# EAGLE board untitledNEW (EAGLE 7.2.0)
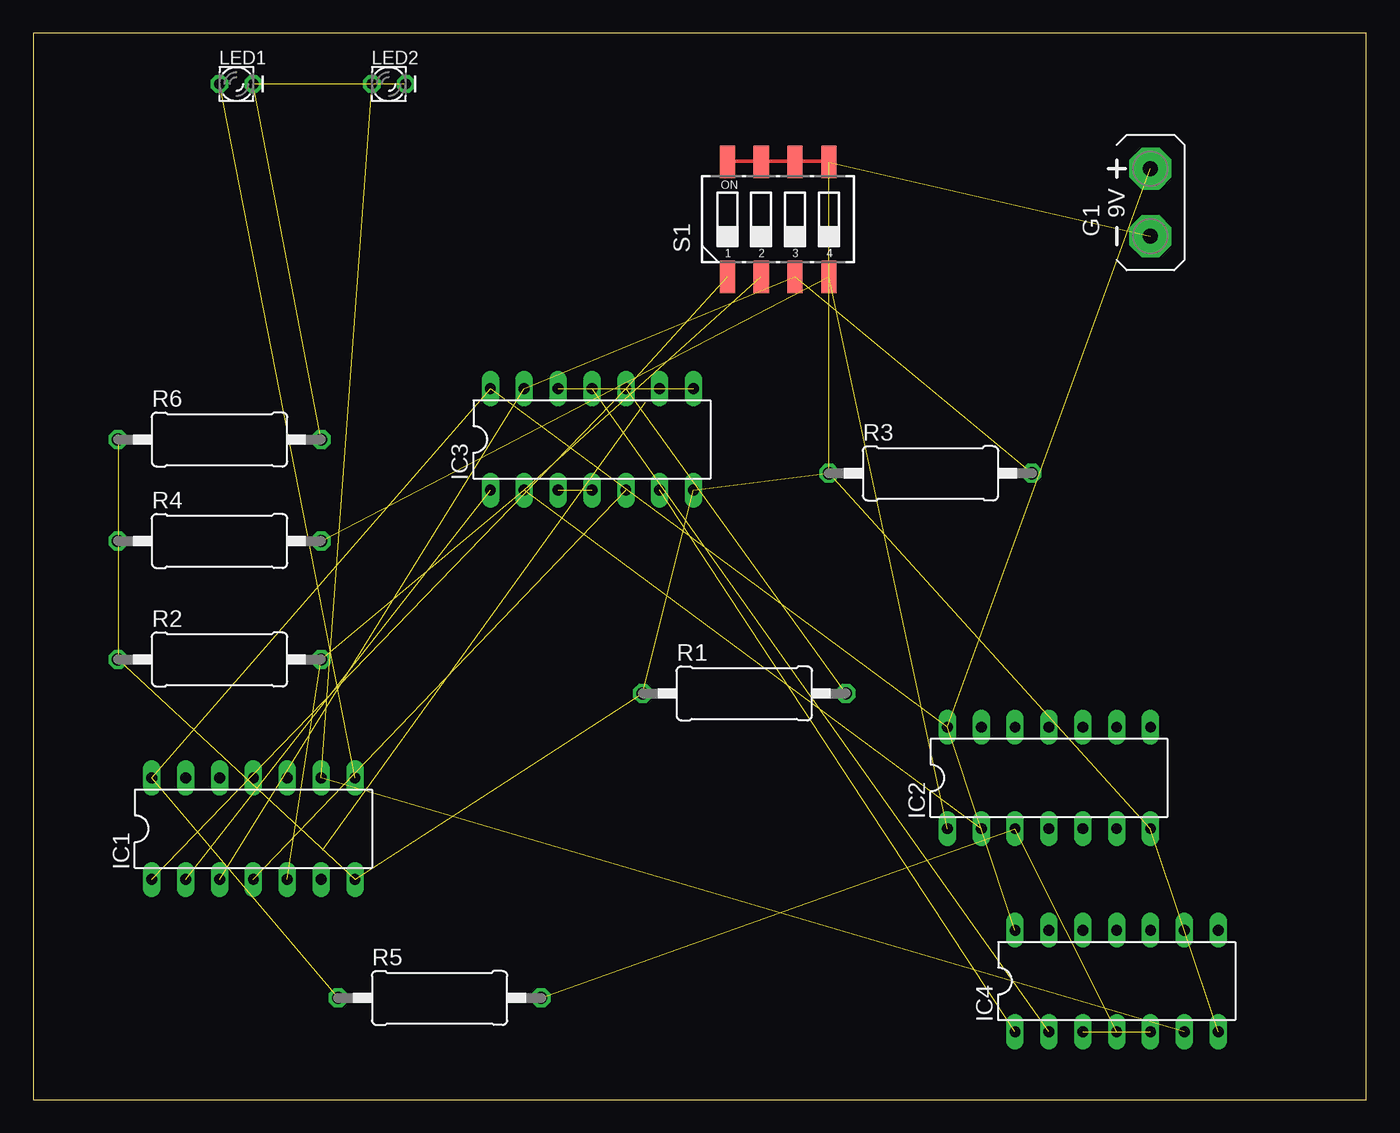
[diagram p0: board, top side]
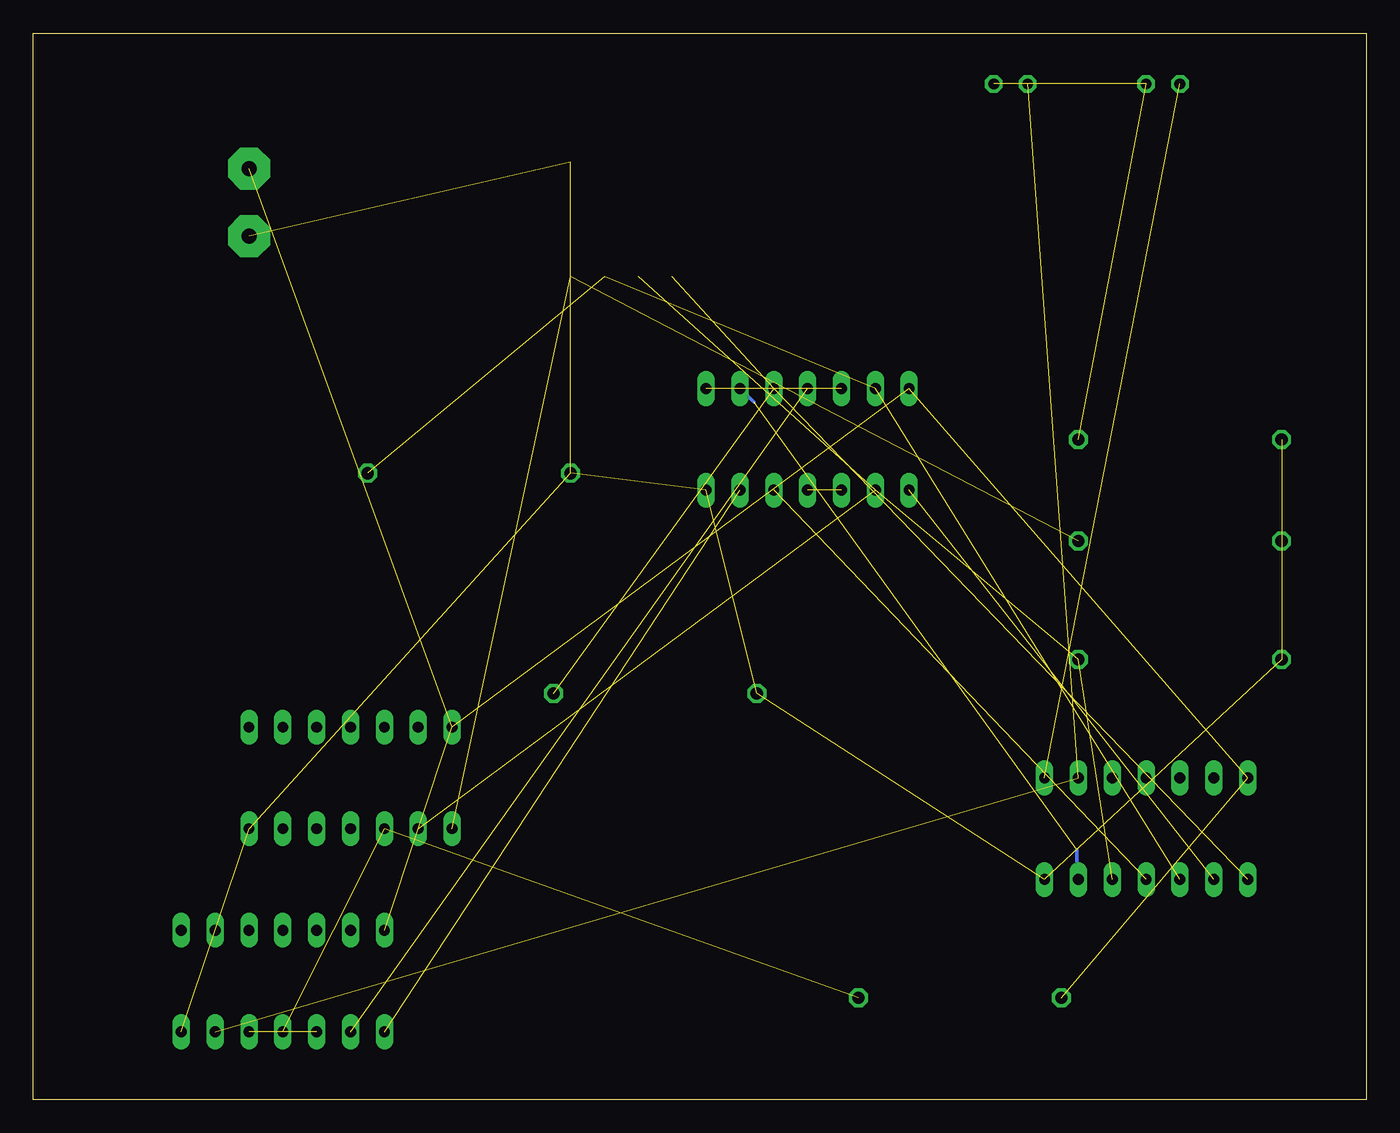
[diagram p1: board, bottom side, seen from below]

Size 100 x 80 mm. Coordinates in mm from the lower left corner, seen from the top.
Outline: 0,0 100,0 100,80 0,80 0,0
Copper layers (1*16): Top 0.035mm / dielectric 1.5mm / Bottom 0.035mm
Design rules "default": minimum track width 10mil, minimum drill 24mil, track to track 8mil, track to pad 8mil, pad to pad 8mil, via to via 8mil, smd to smd 8mil, copper to edge 40mil, drill to drill 8mil, minimum pad ring 10mil, minimum via ring 8mil, stop-mask expansion 4mil, vias tented up to drill 0mil, thermal gap 10mil

## Footprints (pad centres in the part's own frame; a part is rotated, then mirrored left to right if it is on the bottom)
AB9V = drill 1.118 pad 3.15 octagon: + 0,2.54; - 0,-2.54
DIL14 = drill 0.813 long: 1 -7.62,-3.81; 2 -5.08,-3.81; 3 -2.54,-3.81; 4 0,-3.81; 5 2.54,-3.81; 6 5.08,-3.81; 7 7.62,-3.81; 8 7.62,3.81; 9 5.08,3.81; 10 2.54,3.81; 11 0,3.81; 12 -2.54,3.81; 13 -5.08,3.81; 14 -7.62,3.81
LED_LD260 = drill 0.813 octagon: A -1.27,0; K 1.27,0
0411/15 = drill 0.914 octagon: 1 -7.62,0; 2 7.62,0
CTS-219-04 = smd 1.13 x 2.44: 1 -3.81,-4.3; 2 -1.27,-4.3; 3 1.27,-4.3; 4 3.81,-4.3; 5 3.81,4.3; 6 1.27,4.3; 7 -1.27,4.3; 8 -3.81,4.3

## Placement (x,y rotation side)
G1  AB9V  [AB9V]  83.82,67.31 0 top
IC1  74ALS04N  [DIL14]  16.51,20.32 0 top
IC2  74LS266N  [DIL14]  76.2,24.13 0 top
IC3  74LS08N  [DIL14]  41.91,49.53 0 top
IC4  74LS32N  [DIL14]  81.28,8.89 0 top
LED1  [LED_LD260]  15.24,76.2 0 top
LED2  [LED_LD260]  26.67,76.2 0 top
R1  10k  [0411/15]  53.34,30.48 0 top
R2  10k  [0411/15]  13.97,33.02 0 top
R3  10k  [0411/15]  67.31,46.99 0 top
R4  10k  [0411/15]  13.97,41.91 0 top
R5  10k  [0411/15]  30.48,7.62 0 top
R6  220  [0411/15]  13.97,49.53 0 top
S1  219-04  [CTS-219-04]  55.88,66.04 0 top

## Library data of the parts
G1 = battery
IC1-IC4 = 74xx-us
LED1 LED2 = eagle-ltspice; SPICEMODEL: NONE; SPICEPREFIX: D; SPICETYPE: diode
R1-R6 = rcl
S1 = switch-dil; OC_FARNELL: unknown; OC_NEWARK: unknown

## Nets
N$1: IC2.1 R4.2 S1.4
N$2: IC1.5 IC2.2 IC3.2 R2.2 S1.2
N$3: IC1.1 IC3.10 R1.2 S1.1
N$4: IC1.4 IC3.5
N$5: G1.+ IC1.14 IC2.14 IC3.14 IC4.14 R5.1
N$7: IC1.3 IC3.13 R3.2 S1.3
N$8: IC1.2 IC3.1
N$9: IC3.3 IC3.4
N$10: IC3.6 IC4.1
N$11: IC3.11 IC4.2
N$12: IC1.6 IC3.9
N$13: IC3.8 IC3.12
N$14: IC2.3 IC4.4 R5.2
N$15: IC4.3 IC4.5
N$16: IC1.9 IC4.6 LED2.A
N$17: IC1.8 LED1.A
N$18: LED1.K LED2.K R6.2
N$20: G1.- IC1.7 IC2.7 IC3.7 IC4.7 R1.1 R2.1 R3.1 R4.1 R6.1 S1.5 S1.6 S1.7 S1.8

## Tracks (layer width: path | path; a pad name or v marks a point on that pad's centre or on a via)
N$1  (2 unrouted)
N$2  (4 unrouted)
N$3  (3 unrouted)
N$4  (1 unrouted)
N$5  (5 unrouted)
N$7  (3 unrouted)
N$8  (1 unrouted)
N$9  (1 unrouted)
N$10  (1 unrouted)
N$11  (1 unrouted)
N$12  (1 unrouted)
  Bottom 0.254: 21.72,18.75 21.72,16.69 IC1.6 | 45.95,52.35 46.86,53.26 IC3.9
N$13  (1 unrouted)
N$14  (2 unrouted)
N$15  (1 unrouted)
N$16  (2 unrouted)
N$17  (1 unrouted)
N$18  (2 unrouted)
N$20  (10 unrouted)
  Top 0.254: S1.8 52.12,70.41 54.41,70.41 S1.7 54.63,70.41 57.15,70.41 | 57.15,70.41 59.66,70.41 S1.5 | 57.15,70.41 S1.6